# EAGLE board MotorDriverBreakouts_v19 (EAGLE 9.7.0)
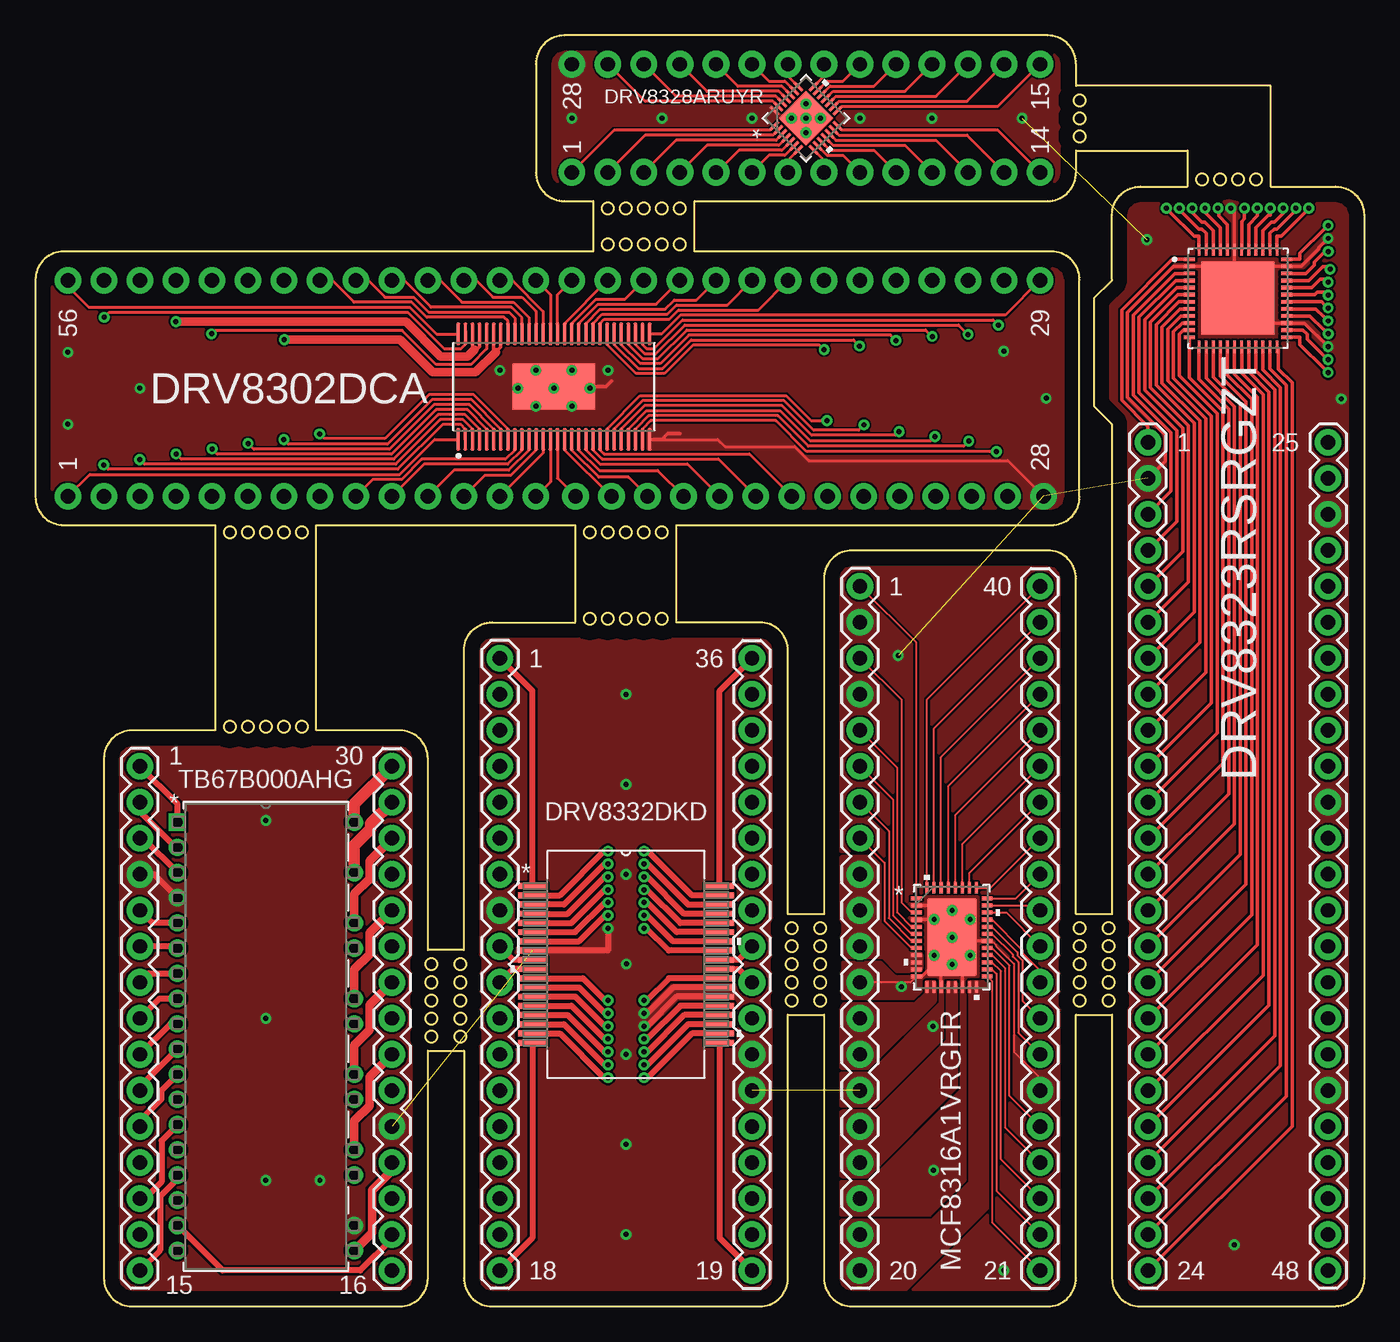
[diagram p0: board, top side]
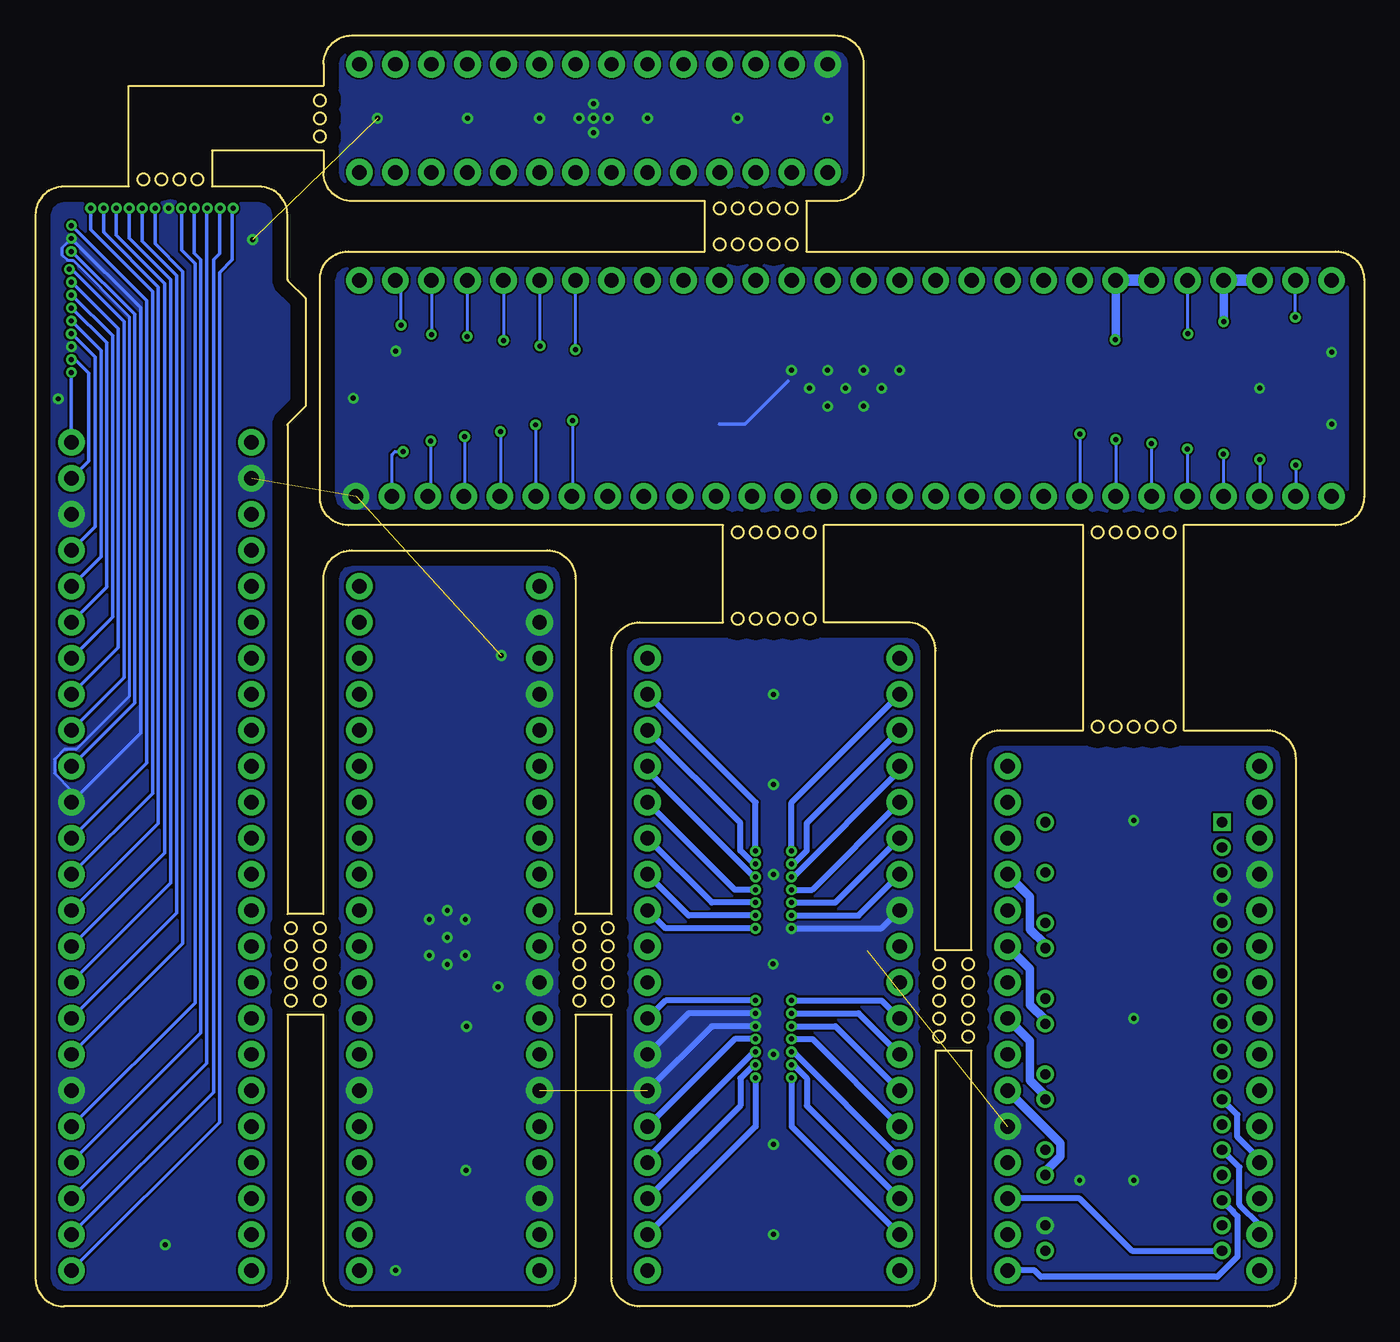
[diagram p1: board, bottom side, seen from below]

Size 93.73 x 89.66 mm. Coordinates in mm from the lower left corner, seen from the top.
Outline: 12.7,40.64 6.83,40.64 arc90 4.83,38.64 4.83,2 arc90 6.83,0 25.69,0 arc90 27.69,2 27.69,18.03 30.23,18.03 30.23,2 arc90 32.23,0 51.09,0 arc90 53.09,2 53.09,20.57 55.63,20.57 55.63,2 arc90 57.63,0 71.41,0 arc90 73.41,2 73.41,20.57 75.95,20.57 75.95,2 arc90 77.95,0 91.73,0 arc90 93.73,2 93.73,76.99 arc90 91.73,78.99 87.14,78.99 87.14,86.11 73.41,86.11 73.41,87.66 arc90 71.41,89.66 37.31,89.66 arc90 35.31,87.66 35.31,79.98 arc90 37.31,77.98 39.34,77.98 39.34,74.42 2,74.42 arc90 0,72.42 0,57.12 arc90 2,55.12 12.7,55.12 12.7,40.64
Outline: 75.95,72.45 75.95,76.99 arc-90 77.95,78.99 81.27,78.99 81.27,81.53 73.41,81.53 73.41,79.98 arc-90 71.41,77.98 46.5,77.98 46.5,74.42 71.66,74.42 arc-90 73.66,72.42 73.66,57.12 arc-90 71.66,55.12 45.21,55.12 45.21,48.26 51.09,48.26 arc-90 53.09,46.26 53.09,27.69 55.63,27.69 55.63,51.34 arc-90 57.63,53.34 71.41,53.34 arc-90 73.41,51.34 73.41,27.69 75.95,27.69 75.95,62.17 arc45 75.9,62.27 74.68,63.5 74.68,71.12 75.9,72.34 arc45 75.95,72.45
Outline: 30.23,25.15 30.23,46.26 arc-90 32.23,48.26 38.1,48.26 38.1,55.12 19.81,55.12 19.81,40.64 25.69,40.64 arc-90 27.69,38.64 27.69,25.15 30.23,25.15
Outline: circle at 40.39,77.47 radius 0.4
Outline: circle at 41.66,77.47 radius 0.4
Outline: circle at 42.93,77.47 radius 0.4
Outline: circle at 44.2,77.47 radius 0.4
Outline: circle at 45.47,77.47 radius 0.4
Outline: circle at 40.39,74.93 radius 0.4
Outline: circle at 41.66,74.93 radius 0.4
Outline: circle at 42.93,74.93 radius 0.4
Outline: circle at 44.2,74.93 radius 0.4
Outline: circle at 45.47,74.93 radius 0.4
Outline: circle at 75.69,26.67 radius 0.4
Outline: circle at 75.69,25.4 radius 0.4
Outline: circle at 75.69,24.13 radius 0.4
Outline: circle at 75.69,22.86 radius 0.4
Outline: circle at 75.69,21.59 radius 0.4
Outline: circle at 73.66,26.67 radius 0.4
Outline: circle at 73.66,25.4 radius 0.4
Outline: circle at 73.66,24.13 radius 0.4
Outline: circle at 73.66,22.86 radius 0.4
Outline: circle at 73.66,21.59 radius 0.4
Copper layers (1*16): Top / Bottom
Stack-up Default Layer Stack: Top User Defined 0.035mm / Dielectric-1 User Defined 1.5mm / Bottom User Defined 0.035mm
Design rules "default": minimum track width 6mil, minimum drill 0.35mm, track to track 6mil, track to pad 6mil, pad to pad 6mil, via to via 6mil, smd to smd 6mil, copper to edge 40mil, drill to drill 6mil, minimum pad ring 10mil, minimum via ring 8mil, stop-mask expansion 4mil, vias tented up to drill 0mil, thermal gap 10mil

## Footprints (pad centres in the part's own frame; a part is rotated, then mirrored left to right if it is on the bottom)
1X18 = drill 1.016 pad 1.88: 1 0,0; 2 2.54,0; 3 5.08,0; 4 7.62,0; 5 10.16,0; 6 12.7,0; 7 15.24,0; 8 17.78,0; 9 20.32,0; 10 22.86,0; 11 25.4,0; 12 27.94,0; 13 30.48,0; 14 33.02,0; 15 35.56,0; 16 38.1,0; 17 40.64,0; 18 43.18,0
1X15 = drill 1.016 pad 1.88: 1 0,0; 2 2.54,0; 3 5.08,0; 4 7.62,0; 5 10.16,0; 6 12.7,0; 7 15.24,0; 8 17.78,0; 9 20.32,0; 10 22.86,0; 11 25.4,0; 12 27.94,0; 13 30.48,0; 14 33.02,0; 15 35.56,0
1X20 = drill 1.016 pad 1.88: 1 0,0; 2 2.54,0; 3 5.08,0; 4 7.62,0; 5 10.16,0; 6 12.7,0; 7 15.24,0; 8 17.78,0; 9 20.32,0; 10 22.86,0; 11 25.4,0; 12 27.94,0; 13 30.48,0; 14 33.02,0; 15 35.56,0; 16 38.1,0; 17 40.64,0; 18 43.18,0; 19 45.72,0; 20 48.26,0
1X24 = drill 1.016 pad 1.88: 2 -26.67,0; 3 -24.13,0; 4 -21.59,0; 5 -19.05,0; 6 -16.51,0; 7 -13.97,0; 8 -11.43,0; 9 -8.89,0; 10 -6.35,0; 11 -3.81,0; 12 -1.27,0; 13 1.27,0; 14 3.81,0; 15 6.35,0; 16 8.89,0; 17 11.43,0; 18 13.97,0; 19 16.51,0; 20 19.05,0; 21 21.59,0; 22 24.13,0; 23 26.67,0; 24 29.21,0; 25 31.75,0
1X14_NO_SILK = drill 1.016 pad 1.88: 1 0,0; 2 2.54,0; 3 5.08,0; 4 7.62,0; 5 10.16,0; 6 12.7,0; 7 15.24,0; 8 17.78,0; 9 20.32,0; 10 22.86,0; 11 25.4,0; 12 27.94,0; 13 30.48,0; 14 33.02,0
DKD36 = smd 2.108 x 0.432: 1 -6.6,5.525; 2 -6.6,4.875; 3 -6.6,4.225; 4 -6.6,3.575; 5 -6.6,2.925; 6 -6.6,2.275; 7 -6.6,1.625; 8 -6.6,0.975; 9 -6.6,0.325; 10 -6.6,-0.325; 11 -6.6,-0.975; 12 -6.6,-1.625; 13 -6.6,-2.275; 14 -6.6,-2.925; 15 -6.6,-3.575; 16 -6.6,-4.225; 17 -6.6,-4.875; 18 -6.6,-5.525; 19 6.6,-5.525; 20 6.6,-4.875; 21 6.6,-4.225; 22 6.6,-3.575; 23 6.6,-2.925; 24 6.6,-2.275; 25 6.6,-1.625; 26 6.6,-0.975; 27 6.6,-0.325; 28 6.6,0.325; 29 6.6,0.975; 30 6.6,1.625; 31 6.6,2.275; 32 6.6,2.925; 33 6.6,3.575; 34 6.6,4.225; 35 6.6,4.875; 36 6.6,5.525
VQFN40_RGF_TEX = smd 0.8 x 0.25: 1 -2.5,2.751; 2 -2.5,2.251; 3 -2.5,1.75; 4 -2.5,1.25; 5 -2.5,0.75; 6 -2.5,0.25; 7 -2.5,-0.25; 8 -2.5,-0.75; 9 -2.5,-1.25; 10 -2.5,-1.75; 11 -2.5,-2.251; 12 -2.5,-2.751; 21 2.5,-2.751; 22 2.5,-2.251; 23 2.5,-1.75; 24 2.5,-1.25; 25 2.5,-0.75; 26 2.5,-0.25; 27 2.5,0.25; 28 2.5,0.75; 29 2.5,1.25; 30 2.5,1.75; 31 2.5,2.251; 32 2.5,2.751 | smd 0.25 x 0.8: 13 -1.75,-3.5; 14 -1.25,-3.5; 15 -0.75,-3.5; 16 -0.25,-3.5; 17 0.25,-3.5; 18 0.75,-3.5; 19 1.25,-3.5; 20 1.75,-3.5; 33 1.75,3.5; 34 1.25,3.5; 35 0.75,3.5; 36 0.25,3.5; 37 -0.25,3.5; 38 -0.75,3.5; 39 -1.25,3.5; 40 -1.75,3.5 | smd 3.5 x 5.5: 41 0,0
SOP50P810X120-57N = smd 1.57 x 0.28: 1 -3.72,6.75; 2 -3.72,6.25; 3 -3.72,5.75; 4 -3.72,5.25; 5 -3.72,4.75; 6 -3.72,4.25; 7 -3.72,3.75; 8 -3.72,3.25; 9 -3.72,2.75; 10 -3.72,2.25; 11 -3.72,1.75; 12 -3.72,1.25; 13 -3.72,0.75; 14 -3.72,0.25; 15 -3.72,-0.25; 16 -3.72,-0.75; 17 -3.72,-1.25; 18 -3.72,-1.75; 19 -3.72,-2.25; 20 -3.72,-2.75; 21 -3.72,-3.25; 22 -3.72,-3.75; 23 -3.72,-4.25; 24 -3.72,-4.75; 25 -3.72,-5.25; 26 -3.72,-5.75; 27 -3.72,-6.25; 28 -3.72,-6.75; 29 3.72,-6.75; 30 3.72,-6.25; 31 3.72,-5.75; 32 3.72,-5.25; 33 3.72,-4.75; 34 3.72,-4.25; 35 3.72,-3.75; 36 3.72,-3.25; 37 3.72,-2.75; 38 3.72,-2.25; 39 3.72,-1.75; 40 3.72,-1.25; 41 3.72,-0.75; 42 3.72,-0.25; 43 3.72,0.25; 44 3.72,0.75; 45 3.72,1.25; 46 3.72,1.75; 47 3.72,2.25; 48 3.72,2.75; 49 3.72,3.25; 50 3.72,3.75; 51 3.72,4.25; 52 3.72,4.75; 53 3.72,5.25; 54 3.72,5.75; 55 3.72,6.25; 56 3.72,6.75 | smd 3.235 x 5.82: 57 0,0
RUY0028A_WQFN_TEX = smd 0.805 x 0.203: 1 -1.947,1.2; 2 -1.947,0.8; 3 -1.947,0.4; 4 -1.947,0; 5 -1.947,-0.4; 6 -1.947,-0.8; 7 -1.947,-1.2; 15 1.947,-1.2; 16 1.947,-0.8; 17 1.947,-0.4; 18 1.947,0; 19 1.947,0.4; 20 1.947,0.8; 21 1.947,1.2 | smd 0.203 x 0.805: 8 -1.2,-1.947; 9 -0.8,-1.947; 10 -0.4,-1.947; 11 0,-1.947; 12 0.4,-1.947; 13 0.8,-1.947; 14 1.2,-1.947; 22 1.2,1.947; 23 0.8,1.947; 24 0.4,1.947; 25 0,1.947; 26 -0.4,1.947; 27 -0.8,1.947; 28 -1.2,1.947 | smd 2.692 x 2.692: 29 0,0
P-HDIP30-1233-1P78-001_TOS = drill 0.714 pad 1.222 square: 1 0,0 | drill 0.714 pad 1.222: 2 0,-1.778; 3 0,-3.556; 4 0,-5.334; 5 0,-7.112; 6 0,-8.89; 7 0,-10.668; 8 0,-12.446; 9 0,-14.224; 10 0,-16.002; 11 0,-17.78; 12 0,-19.558; 13 0,-21.336; 14 0,-23.114; 15 0,-24.892; 16 0,-26.67; 17 0,-28.448; 18 0,-30.226; 19 12.47,-30.226; 20 12.47,-28.448; 21 12.47,-24.892; 22 12.47,-23.114; 23 12.47,-19.558; 24 12.47,-17.78; 25 12.47,-14.224; 26 12.47,-12.446; 27 12.47,-8.89; 28 12.47,-7.112; 29 12.47,-3.556; 30 12.47,0
QFN50P700X700X100-49N = smd 0.86 x 0.26: 1 -3.435,2.75; 2 -3.435,2.25; 3 -3.435,1.75; 4 -3.435,1.25; 5 -3.435,0.75; 6 -3.435,0.25; 7 -3.435,-0.25; 8 -3.435,-0.75; 9 -3.435,-1.25; 10 -3.435,-1.75; 11 -3.435,-2.25; 12 -3.435,-2.75; 25 3.435,-2.75; 26 3.435,-2.25; 27 3.435,-1.75; 28 3.435,-1.25; 29 3.435,-0.75; 30 3.435,-0.25; 31 3.435,0.25; 32 3.435,0.75; 33 3.435,1.25; 34 3.435,1.75; 35 3.435,2.25; 36 3.435,2.75 | smd 0.26 x 0.86: 13 -2.75,-3.435; 14 -2.25,-3.435; 15 -1.75,-3.435; 16 -1.25,-3.435; 17 -0.75,-3.435; 18 -0.25,-3.435; 19 0.25,-3.435; 20 0.75,-3.435; 21 1.25,-3.435; 22 1.75,-3.435; 23 2.25,-3.435; 24 2.75,-3.435; 37 2.75,3.435; 38 2.25,3.435; 39 1.75,3.435; 40 1.25,3.435; 41 0.75,3.435; 42 0.25,3.435; 43 -0.25,3.435; 44 -0.75,3.435; 45 -1.25,3.435; 46 -1.75,3.435; 47 -2.25,3.435; 48 -2.75,3.435 | smd 5.15 x 5.15: 49 0,0

## Placement (x,y rotation side)
J1  [1X18]  32.77,45.72 270 top
J2  [1X18]  50.55,2.54 90 top
J3  [1X15]  7.37,38.1 270 top
J4  [1X15]  25.15,2.54 90 top
J5  [1X20]  58.17,50.8 270 top
J6  [1X20]  70.87,2.54 90 top
J7  [1X24]  78.49,34.29 270 top
J8  [1X14_NO_SILK]  2.29,57.15 0 top
J9  [1X14_NO_SILK]  38.1,57.15 0 top
J10  [1X14_NO_SILK]  70.87,72.39 180 top
J11  [1X14_NO_SILK]  35.31,72.39 180 top
J12  [1X14_NO_SILK]  37.85,80.01 0 top
J13  [1X14_NO_SILK]  70.87,87.63 180 top
J14  [1X24]  91.19,34.29 270 top
U1  DRV8332DKDDKD36  [DKD36]  41.66,24.13 0 top
U2  MCF8316A1VRGFRVQFN40_RGF_TEX  [VQFN40_RGF_TEX]  64.64,26.04 0 top
U3  DRV8302DCA  [SOP50P810X120-57N]  36.58,64.89 90 top
U4  DRV8328ARUYRRUY0028A_WQFN_TEX  [RUY0028A_WQFN_TEX]  54.36,83.82 45 top
U5  TB67B000AHGP-HDIP30-1233-1P78-001_TOS  [P-HDIP30-1233-1P78-001_TOS]  10.02,34.16 0 top
U6  DRV8323RSRGZT  [QFN50P700X700X100-49N]  84.84,71.12 0 top

## Library data of the parts
J1-J14 = SparkFun-Connectors
U1 = SnapEDA Library; COPYRIGHT: Copyright (C) 2023 Ultra Librarian. All rights reserved.; MANUFACTURER_PART_NUMBER: DRV8332DKD; MFR_NAME: Texas Instruments
U2 = SnapEDA Library; COPYRIGHT: Copyright (C) 2023 Ultra Librarian. All rights reserved.; MANUFACTURER_PART_NUMBER: MCF8316A1VRGFR; MFR_NAME: Texas Instruments
U3 = SnapEDA Library; MF: Texas Instruments; MP: DRV8302DCA; PACKAGE: HTSSOP-56 Texas Instruments; PRICE: None; STANDARD: IPC7351B
U4 = SnapEDA Library; COPYRIGHT: Copyright (C) 2023 Ultra Librarian. All rights reserved.; MANUFACTURER_PART_NUMBER: DRV8328ARUYR; MFR_NAME: Texas Instruments
U5 = SnapEDA Library; COPYRIGHT: Copyright (C) 2023 Ultra Librarian. All rights reserved.; MANUFACTURER_PART_NUMBER: TB67B000AHG; MFR_NAME: Toshiba Electronic Devices & Storage Corp.
U6 = SnapEDA Library; MANUFACTURER: Texas Instruments; MAXIMUM_PACKAGE_HEIGHT: 1 mm; PARTREV: C; STANDARD: IPC-7351B

## Nets
GND: J1.8 J2.6 J2.7 J3.4 J4.5 J5.2 J5.4 J5.12 J5.15 J5.18 J6.6 J7.3 J9.14 J13.14 J14.4 J14.12 J14.20 U1.8 U1.24 U1.25 U2.2 U2.4 U2.12 U2.15 U2.18 U2.26 U2.41 U3.28 U3.57 U4.28 U4.29 U5.4 U5.20 U6.2 U6.27 U6.35 U6.43 U6.49
N$1: J3.1 U5.1
N$2: J3.2 U5.2
N$3: J3.3 U5.3
N$5: J3.5 U5.5
N$6: J3.6 U5.6
N$7: J3.7 U5.7
N$8: J3.8 U5.8
N$9: J3.9 U5.9
N$10: J3.10 U5.10
N$11: J3.11 U5.11
N$12: J3.12 U5.12
N$13: J3.13 U5.13
N$14: J3.14 U5.14
N$15: J3.15 U5.15
N$16: J4.1 U5.16
N$17: J4.2 U5.17
N$18: J4.3 U5.18
N$19: J4.4 U5.19
N$21: J4.6 U5.21
N$22: J4.7 U5.22
N$23: J4.8 U5.23
N$24: J4.9 U5.24
N$25: J4.10 U5.25
N$26: J4.11 U5.26
N$27: J4.12 U5.27
N$28: J4.13 U5.28
N$29: J4.14 U5.29
N$30: J4.15 U5.30
N$31: J1.1 U1.1
N$32: J1.2 U1.2
N$33: J1.3 U1.3
N$34: J1.4 U1.4
N$35: J1.5 U1.5
N$36: J1.6 U1.6
N$37: J1.7 U1.7
N$39: J1.9 U1.9
N$40: J1.10 U1.10
N$41: J1.11 U1.11
N$42: J1.12 U1.12
N$43: J1.13 U1.13
N$44: J1.14 U1.14
N$45: J1.15 U1.15
N$46: J1.16 U1.16
N$47: J1.17 U1.17
N$48: J1.18 U1.18
N$49: J2.1 U1.19
N$50: J2.2 U1.20
N$51: J2.3 U1.21
N$52: J2.4 U1.22
N$53: J2.5 U1.23
N$56: J2.8 U1.26
N$57: J2.9 U1.27
N$58: J2.10 U1.28
N$59: J2.11 U1.29
N$60: J2.12 U1.30
N$61: J2.13 U1.31
N$62: J2.14 U1.32
N$63: J2.15 U1.33
N$64: J2.16 U1.34
N$65: J2.17 U1.35
N$66: J2.18 U1.36
N$67: J5.1 U2.1
N$69: J5.3 U2.3
N$71: J5.5 U2.5
N$72: J5.6 U2.6
N$73: J5.7 U2.7
N$74: J5.8 U2.8
N$77: J5.9 J5.10 J5.11 U2.9 U2.10 U2.11
N$79: J5.13 J5.14 U2.13 U2.14
N$82: J5.16 J5.17 U2.16 U2.17
N$85: J5.19 J5.20 U2.19 U2.20
N$87: J6.1 U2.21
N$88: J6.2 U2.22
N$89: J6.3 U2.23
N$90: J6.4 U2.24
N$91: J6.5 U2.25
N$93: J6.7 U2.27
N$94: J6.8 U2.28
N$95: J6.9 U2.29
N$96: J6.10 U2.30
N$97: J6.11 U2.31
N$98: J6.12 U2.32
N$99: J6.13 U2.33
N$100: J6.14 U2.34
N$101: J6.15 U2.35
N$102: J6.16 U2.36
N$103: J6.17 U2.37
N$104: J6.18 U2.38
N$105: J6.19 U2.39
N$106: J6.20 U2.40
N$107: J8.1 U3.1
N$108: J8.3 U3.3
N$109: J8.2 U3.2
N$110: J8.5 U3.5
N$111: J8.6 U3.6
N$112: J8.4 U3.4
N$113: J8.7 U3.7
N$114: J8.8 U3.8
N$115: J8.9 U3.9
N$116: J8.11 U3.11
N$117: J8.10 U3.10
N$118: J8.12 U3.12
N$119: J9.2 U3.16
N$120: J9.1 U3.15
N$121: J8.14 U3.14
N$122: J8.13 U3.13
N$123: J9.3 U3.17
N$124: J9.4 U3.18
N$125: J9.5 U3.19
N$126: J9.6 U3.20
N$127: J9.8 U3.22
N$128: J9.7 U3.21
N$129: J9.10 U3.24
N$130: J9.9 U3.23
N$131: J9.11 U3.25
N$132: J9.12 U3.26
N$133: J9.13 U3.27
N$134: J10.1 U3.29
N$135: J10.2 U3.30
N$137: J10.3 U3.31
N$138: J10.4 U3.32
N$139: J10.5 U3.33
N$140: J10.6 U3.34
N$141: J10.7 U3.35
N$142: J10.9 U3.37
N$143: J10.8 U3.36
N$144: J10.10 U3.38
N$145: J10.11 U3.39
N$146: J10.12 U3.40
N$147: J10.14 U3.42
N$148: J11.1 U3.43
N$149: J10.13 U3.41
N$150: J11.3 U3.45
N$151: J11.2 U3.44
N$152: J11.4 U3.46
N$153: J11.5 U3.47
N$154: J11.6 U3.48
N$155: J11.7 U3.49
N$156: J11.8 J11.9 U3.50 U3.51
N$157: J11.10 U3.52
N$158: J11.11 J11.12 U3.53 U3.54
N$159: J11.13 U3.55
N$160: J11.14 U3.56
N$161: J12.1 U4.1
N$162: J12.2 U4.2
N$163: J12.3 U4.3
N$164: J12.4 U4.4
N$165: J12.5 U4.5
N$166: J12.6 U4.6
N$167: J12.7 U4.7
N$168: J12.8 U4.8
N$169: J12.9 U4.9
N$170: J12.10 U4.10
N$171: J12.11 U4.11
N$172: J12.12 U4.12
N$173: J12.13 U4.13
N$174: J12.14 U4.14
N$175: J13.1 U4.15
N$176: J13.2 U4.16
N$177: J13.3 U4.17
N$178: J13.4 U4.18
N$179: J13.5 U4.19
N$180: J13.6 U4.20
N$181: J13.7 U4.21
N$182: J13.8 U4.22
N$183: J13.9 U4.23
N$184: J13.10 U4.24
N$185: J13.11 U4.25
N$186: J13.12 U4.26
N$187: J13.13 U4.27
N$189: J7.2 U6.1
N$190: J7.4 U6.3
N$192: J7.5 U6.4
N$193: J7.6 U6.5
N$194: J7.7 U6.6
N$195: J7.8 U6.7
N$196: J7.10 U6.9
N$197: J7.9 U6.8
N$198: J7.12 U6.11
N$199: J7.13 U6.12
N$200: J7.14 U6.13
N$201: J7.15 U6.14
N$202: J7.17 U6.16
N$203: J7.18 U6.17
N$204: J7.16 U6.15
N$205: J7.11 U6.10
N$206: J7.22 U6.21
N$207: J7.23 U6.22
N$208: J7.20 U6.19
N$209: J7.19 U6.18
N$210: J7.21 U6.20
N$211: J7.24 U6.23
N$212: J7.25 U6.24
N$213: J14.2 U6.25
N$214: J14.3 U6.26
N$215: J14.5 U6.28
N$217: J14.6 U6.29
N$218: J14.7 U6.30
N$219: J14.8 U6.31
N$220: J14.9 U6.32
N$221: J14.10 U6.33
N$222: J14.11 U6.34
N$224: J14.14 U6.37
N$225: J14.15 U6.38
N$226: J14.16 U6.39
N$227: J14.17 U6.40
N$228: J14.25 U6.48
N$229: J14.24 U6.47
N$230: J14.23 U6.46
N$231: J14.22 U6.45
N$232: J14.21 U6.44
N$234: J14.19 U6.42
N$235: J14.18 U6.41
N$236: J14.13 U6.36

## Tracks (layer width: path | path; a pad name or v marks a point on that pad's centre or on a via)
GND  (via drill 0.35)  (5 unrouted)
  Top 0.152: J5.12 61.72,22.86 U2.12 | U2.26 67.48,25.79 67.77,25.49 67.77,25.42 69.03,24.17 69.03,17.97 70.87,16.13 J6.6
  Top 0.2: 44.2,61.17 48.13,61.17 48.63,60.67 53.55,60.67 54.54,59.68 68.59,59.68 J9.14
  Top 0.254: U2.18 65.39,26.04 U2.41 | U2.41 64.64,27.29 | 64.64,27.29 U2.4 | U2.2 64.64,28.29 64.64,27.29 | U2.41 64.64,25.38 62.55,23.28 U2.12 | U2.41 64.89,25.79 U2.26 | U2.41 63.89,25.29 U2.15 | J7.3 79.7,59.64 79.7,61.47 77.03,64.14 77.03,70.11 80.29,73.37 U6.2 82.59,73.37 U6.49 | v84.33,77.47 84.59,77.21 U6.43 84.59,71.37 U6.49 | U6.49 87.09,73.37 U6.35 89.28,73.37 90.53,74.61 90.53,74.71 90.91,75.09 90.93,75.09 v91.19,75.34 | U6.49 86.59,69.37 U6.27 89.52,69.37 v91.19,67.71 | U3.57 40.25,64.89 40.64,65.28 | U3.28 44.2,61.17 44.6,61.57 45.47,61.57
  Top 0.406: U1.8 40.39,25.11 v40.39,26.67 | U1.24 45.23,21.86 43.15,19.77 v42.93,19.77 | U1.25 44.96,22.5 43.14,20.68 v42.93,20.68 | U5.4 8.37,30.48 J3.4
  Bottom 0.2: J14.12 91.19,36.41 92.38,37.61 92.38,38.59 91.68,39.29 90.85,39.29 87.09,43.05 87.09,69.82 91.07,73.79 91.46,73.79 91.83,74.16 91.83,74.68 91.19,75.33 v91.19,75.34
  Bottom 0.254: v91.19,75.34 86.29,70.44 86.29,40.46 J14.12 | 40.64,65.28 43.69,62.23 45.47,62.23
  Bottom 0.406: J1.8 34.04,26.67 v40.39,26.67 | J2.6 46.01,19.77 v42.93,19.77 | J2.7 47.65,20.68 v42.93,20.68
  other vias: 71.31,64.07 68.3,67.39 78.4,75.26 92.12,64.03 84.58,4.36 63.36,9.6 63.31,19.76 60.87,45.93 41.69,24.15 16.26,34.29 16.26,20.32 16.26,8.89 2.29,67.31 2.29,62.23 7.37,64.77 36.58,64.77 39.12,64.77 37.85,66.04 37.85,63.5 35.31,66.04 35.31,63.5 34.04,64.77 64.67,26.04 64.67,27.94 64.67,24.13 65.94,27.3 63.4,27.3 63.4,24.77 65.94,24.77 68.33,2.54 61.09,22.56 40.39,66.04 32.77,66.04 41.66,17.78 41.66,11.43 41.66,5.08 41.66,30.48 41.66,36.83 41.66,43.18 20.07,8.89 54.36,84.84 54.36,83.82 55.37,83.82 53.34,83.82 54.36,82.8 37.85,83.82 44.2,83.82 69.6,83.82 63.25,83.82 58.17,83.82 50.55,83.82
  pour Top (rank 6, no thermals): -15.49,104.14 110.24,104.14 110.24,-33.02 -15.49,-33.02
  pour Bottom (no thermals): -33.27,121.92 136.91,121.92 136.91,-13.97 -33.27,-13.97
N$1
  Top 0.406: U5.1 10.02,35.45 J3.1
N$2
  Top 0.406: U5.2 9.89,32.38 7.37,34.91 J3.2
N$3
  Top 0.406: U5.3 7.61,33.02 J3.3
N$5
  Top 0.406: U5.5 8.25,27.05 J3.5
N$6
  Top 0.406: U5.6 9.89,25.4 J3.6
N$7
  Top 0.406: J3.7 8,23.5 U5.7
N$8
  Top 0.406: J3.8 8.76,21.72 U5.8
N$9
  Top 0.406: J3.9 9.52,19.94 U5.9
N$10
  Top 0.406: J3.10 7.37,15.51 U5.10
N$11
  Top 0.406: U5.11 8.89,15.25 8.89,14.62 7.37,13.1 J3.11
N$12
  Bottom 0.406: U5.12 8.94,13.53 8.94,11.96 7.37,10.38 J3.12
N$13
  Top 0.406: U5.13 8.89,11.7 8.89,8.78 7.73,7.62 J3.13
N$14
  Bottom 0.406: J3.14 7.37,5.76 8.79,7.18 8.79,9.82 U5.14
N$15
  Top 0.406: U5.15 10.02,8.99 8.79,7.76 8.79,3.96 J3.15
N$16
  Bottom 0.406: J4.1 23.25,2.54 22.8,2.08 10.36,2.08 8.93,3.52 8.93,6.37 9.25,6.69 9.25,6.72 U5.16
N$17
  Top 0.406: U5.17 13.2,2.54 22.91,2.54 25.15,4.78 J4.2
N$18
  Bottom 0.406: U5.18 16.38,3.94 20.07,7.62 J4.3
N$19
  Top 0.61: U5.19 23.75,5.2 23.75,8.2 25.15,9.6 J4.4
N$21
  Bottom 0.61: J4.6 21.42,11.52 21.42,10.61 22.49,9.54 U5.21
N$22
  Top 0.61: J4.7 23.56,16.19 23.56,14.16 22.49,13.09 U5.22
N$23
  Bottom 0.61: U5.23 22.49,14.87 23.56,15.94 23.56,18.73 J4.8
N$24
  Top 0.61: U5.24 22.49,18.43 23.56,19.5 23.56,21.27 J4.9
N$25
  Bottom 0.61: U5.25 22.49,20.21 23.56,21.27 23.56,23.81 J4.10
N$26
  Top 0.61: U5.26 22.49,23.76 23.56,24.83 23.56,26.35 J4.11
N$27
  Bottom 0.61: U5.27 22.49,25.54 23.56,26.61 23.56,28.89 J4.12
N$28
  Top 0.61: U5.28 22.49,29.1 23.56,30.16 23.56,31.43 J4.13
N$29
  Top 0.813: J4.14 23.66,34.08 23.66,33.68 22.49,32.51 U5.29
N$30
  Top 0.813: U5.30 22.49,35.45 J4.15
N$31
  Top 0.406: U1.1 35.06,43.43 J1.1
N$32  (via drill 0.35)
  Top 0.406: U1.2 37.01,29 40.12,32.12 v40.39,32.12
  Bottom 0.406: J1.2 40.39,35.56 v40.39,32.12
N$33  (via drill 0.35)
  Top 0.406: U1.3 37.27,28.36 40.13,31.21 v40.39,31.21
  Bottom 0.406: J1.3 39.31,34.1 39.31,32.16 40.26,31.21 v40.39,31.21
N$34  (via drill 0.35)
  Top 0.406: U1.4 37.54,27.7 40.15,30.3 v40.39,30.3
  Bottom 0.406: v40.39,30.3 40.26,30.3 32.77,37.8 J1.4
N$35  (via drill 0.35)
  Top 0.406: U1.5 37.81,27.05 40.16,29.4 v40.39,29.4
  Bottom 0.406: J1.5 38.93,29.4 v40.39,29.4
N$36  (via drill 0.35)
  Top 0.406: U1.6 38.08,26.41 40.17,28.49 v40.39,28.49
  Bottom 0.406: J1.6 37.3,28.49 v40.39,28.49
N$37  (via drill 0.35)
  Top 0.406: U1.7 38.35,25.75 40.18,27.58 v40.39,27.58
  Bottom 0.406: J1.7 35.67,27.58 v40.39,27.58
N$39
  Top 0.406: U1.9 33.71,24.45 J1.9
N$40
  Top 0.406: U1.10 33.71,23.8 J1.10
N$41  (via drill 0.35)
  Top 0.406: U1.11 38.62,23.16 40.19,21.59 v40.39,21.59
  Bottom 0.406: J1.11 34.04,21.59 v40.39,21.59
N$42  (via drill 0.35)
  Top 0.406: U1.12 38.35,22.5 40.18,20.68 v40.39,20.68
  Bottom 0.406: J1.12 35.67,20.68 v40.39,20.68
N$43  (via drill 0.35)
  Top 0.406: U1.13 38.08,21.86 40.17,19.77 v40.39,19.77
  Bottom 0.406: J1.13 37.3,19.77 v40.39,19.77
N$44  (via drill 0.35)
  Top 0.406: U1.14 37.81,21.2 40.16,18.86 v40.39,18.86
  Bottom 0.406: J1.14 38.93,18.86 v40.39,18.86
N$45  (via drill 0.35)
  Top 0.406: U1.15 37.54,20.55 40.15,17.95 v40.39,17.95
  Bottom 0.406: v40.39,17.95 40.26,17.95 32.77,10.46 J1.15
N$46  (via drill 0.35)
  Top 0.406: U1.16 37.27,19.91 40.13,17.05 v40.39,17.05
  Bottom 0.406: J1.16 39.31,14.16 39.31,16.09 40.26,17.05 v40.39,17.05
N$47  (via drill 0.35)
  Top 0.406: U1.17 37.01,19.25 40.12,16.14 v40.39,16.14
  Bottom 0.406: J1.17 40.39,12.7 v40.39,16.14
N$48
  Top 0.406: U1.18 35.06,4.83 J1.18
N$49
  Top 0.406: U1.19 48.26,4.83 J2.1
N$50  (via drill 0.35)
  Top 0.406: U1.20 46.31,19.25 43.19,16.14 v42.93,16.14
  Bottom 0.406: J2.2 42.93,12.7 v42.93,16.14
N$51  (via drill 0.35)
  Top 0.406: U1.21 46.04,19.91 43.18,17.05 v42.93,17.05
  Bottom 0.406: J2.3 44.01,14.16 44.01,16.09 43.05,17.05 v42.93,17.05
N$52  (via drill 0.35)
  Top 0.406: U1.22 45.77,20.55 43.17,17.95 v42.93,17.95
  Bottom 0.406: v42.93,17.95 43.05,17.95 50.55,10.46 J2.4
N$53  (via drill 0.35)
  Top 0.406: U1.23 45.5,21.2 43.16,18.86 v42.93,18.86
  Bottom 0.406: J2.5 44.38,18.86 v42.93,18.86
N$56  (via drill 0.35)
  Top 0.406: U1.26 44.69,23.16 43.13,21.59 v42.93,21.59
  Bottom 0.406: J2.8 49.28,21.59 v42.93,21.59
N$57
  Top 0.406: U1.27 49.6,23.8 J2.9
N$58
  Top 0.406: U1.28 49.6,24.45 J2.10
N$59  (via drill 0.35)
  Top 0.406: U1.29 44.69,25.11 43.13,26.67 v42.93,26.67
  Bottom 0.406: J2.11 49.28,26.67 v42.93,26.67
N$60  (via drill 0.35)
  Top 0.406: U1.30 44.96,25.75 43.14,27.58 v42.93,27.58
  Bottom 0.406: J2.12 47.65,27.58 v42.93,27.58
N$61  (via drill 0.35)
  Top 0.406: U1.31 45.23,26.41 43.15,28.49 v42.93,28.49
  Bottom 0.406: J2.13 46.01,28.49 v42.93,28.49
N$62  (via drill 0.35)
  Top 0.406: U1.32 45.5,27.05 43.16,29.4 v42.93,29.4
  Bottom 0.406: J2.14 44.38,29.4 v42.93,29.4
N$63  (via drill 0.35)
  Top 0.406: U1.33 45.77,27.7 43.17,30.3 v42.93,30.3
  Bottom 0.406: v42.93,30.3 43.05,30.3 50.55,37.8 J2.15
N$64  (via drill 0.35)
  Top 0.406: U1.34 46.04,28.36 43.18,31.21 v42.93,31.21
  Bottom 0.406: J2.16 44.01,34.1 44.01,32.16 43.05,31.21 v42.93,31.21
N$65  (via drill 0.35)
  Top 0.406: U1.35 46.31,29 43.19,32.12 v42.93,32.12
  Bottom 0.406: J2.17 42.93,35.56 v42.93,32.12
N$66
  Top 0.406: U1.36 48.26,43.43 J2.18
N$67
  Top 0.152: J5.1 62.14,46.82 U2.1
N$69
  Top 0.152: U2.3 61.81,27.79 61.11,28.48 61.11,42.77 J5.3
N$71
  Top 0.152: U2.5 61.81,26.79 60.81,27.78 60.81,38 J5.5
N$72
  Top 0.152: U2.6 61.81,26.29 60.5,27.59 60.5,35.76 J5.6
N$73
  Top 0.152: U2.7 61.81,25.79 60.2,27.39 60.2,33.53 J5.7
N$74
  Top 0.152: U2.8 61.81,25.29 59.89,27.2 59.89,31.29 J5.8
N$77
  pour Top (no thermals): 62.64,25.02 61.77,25.02 59.72,27.08 59.72,31.14 59,31.85 56.16,31.85 56.16,25.4 57.05,24.51 59.74,24.51 60.73,23.52 62.64,23.52
N$79
  pour Top (no thermals): 56.39,21.46 62.05,21.46 62.71,22.12 62.71,22.94 62.79,23.01 63.55,23.01 63.58,22.99 63.58,21.49 58.78,16.69 56.36,16.69 56.36,21.44
N$82
  pour Top (no thermals): 64.24,22.96 64.24,18.8 59.33,13.89 56.31,13.89 56.31,9.3 56.57,9.04 58.72,9.04 65.07,15.39 65.07,22.96
N$85
  pour Top (no thermals): 65.81,23.01 65.81,8.79 63.22,6.2 56.44,6.2 56.41,6.17 56.41,1.22 56.87,0.76 61.14,0.76 67.26,6.88 67.26,22.66 66.9,23.01
N$87
  Top 0.152: J6.1 67.5,5.91 67.5,22.93 U2.21
N$88
  Top 0.152: U2.22 67.48,23.78 67.8,23.46 67.8,8.14 J6.2
N$89
  Top 0.152: U2.23 67.48,24.29 68.11,23.66 68.11,10.38 J6.3
N$90
  Top 0.152: U2.24 67.48,24.79 68.41,23.85 68.41,12.61 J6.4
N$91
  Top 0.152: J6.5 68.72,14.84 68.72,24.04 67.48,25.29 U2.25
N$93
  Top 0.152: U2.27 67.48,26.29 68.94,24.83 68.94,24.69 69.33,24.3 69.33,19.31 J6.7
N$94
  Top 0.152: U2.28 67.48,26.79 69.29,24.98 69.29,24.77 69.64,24.42 69.64,21.55 J6.8
N$95
  Top 0.152: J6.9 70.87,23.71 69.64,24.95 69.64,25.13 67.48,27.29 U2.29
N$96
  Top 0.152: J6.10 68.48,27.79 U2.30
N$97
  Top 0.152: J6.11 70.52,28.29 U2.31
N$98
  Top 0.152: J6.12 69.17,28.79 U2.32
N$99
  Top 0.152: J6.13 67.38,29.54 U2.33
N$100
  Top 0.152: J6.14 65.89,30.59 U2.34
N$101
  Top 0.152: J6.15 65.39,32.63 U2.35
N$102
  Top 0.152: J6.16 64.89,34.67 U2.36
N$103
  Top 0.152: J6.17 64.39,36.71 U2.37
N$104
  Top 0.152: J6.18 63.89,38.75 U2.38
N$105
  Top 0.152: J6.19 63.39,40.79 U2.39
N$106
  Top 0.152: J6.20 62.89,42.83 U2.40
N$107
  Top 0.2: U3.1 28.17,61.17 25.69,58.7 3.83,58.7 J8.1
N$108  (via drill 0.35)
  Top 0.2: U3.3 30.83,61.91 30.18,62.56 28.56,62.56 25.42,59.41 7.69,59.41 v7.36,59.75
  Bottom 0.2: J8.3 7.37,59.74 v7.36,59.75
N$109  (via drill 0.35)
  Top 0.2: U3.2 30.33,61.91 30.03,62.2 28.71,62.2 25.56,59.06 5.12,59.06 v4.82,59.37
  Bottom 0.2: J8.2 v4.83,59.36 v4.82,59.37
N$110  (via drill 0.35)
  Top 0.2: v12.46,60.49 12.83,60.12 25.12,60.12 28.27,63.26 30.47,63.26 31.83,61.91 U3.5
  Bottom 0.2: v12.46,60.49 12.46,57.16 J8.5
N$111  (via drill 0.35)
  Top 0.2: U3.6 32.33,61.91 30.62,63.62 28.12,63.62 24.98,60.47 15.41,60.47 v15,60.88
  Bottom 0.2: v15,60.88 15,57.16 J8.6
N$112  (via drill 0.35)
  Top 0.2: U3.4 31.33,61.91 30.32,62.91 28.41,62.91 25.27,59.77 10.3,59.77 v9.92,60.14
  Bottom 0.2: v9.92,60.14 9.92,57.16 J8.4
N$113  (via drill 0.35)
  Top 0.2: U3.7 32.83,61.91 30.77,63.97 27.98,63.97 24.83,60.82 17.85,60.82 v17.52,61.16
  Bottom 0.2: v17.52,61.16 J8.7
N$114  (via drill 0.35)
  Top 0.2: U3.8 33.33,61.91 30.91,64.32 27.76,64.32 24.66,61.22 20.38,61.22 v20.05,61.55
  Bottom 0.2: v20.05,61.55 20.05,57.17 J8.8
N$115
  Top 0.2: U3.9 33.83,60.43 33.16,59.76 27.26,59.76 25.84,58.34 23.8,58.34 J8.9
N$116
  Top 0.2: J8.11 29.53,58.99 33.39,58.99 34.83,60.43 U3.11
N$117
  Top 0.2: U3.10 34.33,60.43 33.31,59.41 27.4,59.41 J8.10
N$118
  Top 0.2: J8.12 31.7,58.62 33.52,58.62 35.33,60.43 U3.12
N$119
  Top 0.2: J9.2 40.6,57.15 37.33,60.43 U3.16
N$120
  Top 0.2: J9.1 36.83,58.42 U3.15
N$121
  Top 0.2: J8.14 36.33,58.17 U3.14
N$122
  Top 0.2: J8.13 35.83,60.21 U3.13
N$123
  Top 0.2: J9.3 41.83,58.5 39.75,58.5 37.83,60.43 U3.17
N$124
  Top 0.2: J9.4 43.9,58.97 39.78,58.97 38.33,60.43 U3.18
N$125
  Top 0.2: J9.5 45.98,59.43 39.83,59.43 38.83,60.43 U3.19
N$126
  Top 0.2: J9.6 48.17,59.78 39.98,59.78 39.33,60.43 U3.20
N$127  (via drill 0.35)
  Top 0.2: v55.83,62.49 54.72,62.49 52.96,64.25 42.66,64.25 40.33,61.91 U3.22
  Bottom 0.2: v55.83,62.49 55.83,57.2 J9.8
N$128
  Top 0.2: J9.7 50.36,60.13 40.12,60.13 39.83,60.43 U3.21
N$129  (via drill 0.35)
  Top 0.2: U3.24 41.33,61.91 42.96,63.54 52.67,63.54 54.75,61.46 60.67,61.46 v60.92,61.71
  Bottom 0.2: J9.10 60.91,57.2 60.91,61.7 v60.92,61.71
N$130  (via drill 0.35)
  Top 0.2: v58.44,62.19 58.06,61.81 54.9,61.81 52.81,63.89 42.81,63.89 40.83,61.91 U3.23
  Bottom 0.2: J9.9 58.42,62.17 v58.44,62.19
N$131  (via drill 0.35)
  Top 0.2: U3.25 41.83,61.91 43.11,63.19 52.52,63.19 54.63,61.08 63.18,61.08 v63.46,61.36
  Bottom 0.2: v63.46,61.36 63.46,57.19 J9.11
N$132  (via drill 0.35)
  Top 0.2: U3.26 42.33,61.91 43.25,62.84 52.38,62.84 54.53,60.68 65.48,60.68 v65.84,61.04
  Bottom 0.2: v65.84,61.04 65.84,57.35 J9.12
N$133  (via drill 0.35)
  Top 0.2: U3.27 42.83,61.91 43.4,62.48 52.23,62.48 54.41,60.31 v67.79,60.31
  Bottom 0.2: J9.13 68.58,60.1 68.37,60.31 v67.79,60.31
N$134
  Top 0.2: J10.1 68.42,69.94 45.52,69.94 44.18,68.61 U3.29
N$135  (via drill 0.35)
  Top 0.2: U3.30 42.83,67.87 43.12,67.57 43.64,67.57 45.66,69.59 67.57,69.59 v67.93,69.23
  Bottom 0.2: J10.2 67.93,72 v67.93,69.23
N$137  (via drill 0.35)
  Top 0.2: U3.31 42.33,67.87 42.98,67.22 43.79,67.22 45.81,69.24 65.12,69.24 v65.79,68.57
  Bottom 0.2: J10.3 v65.79,68.57
N$138  (via drill 0.35)
  Top 0.2: U3.32 41.83,67.87 42.83,66.87 43.93,66.87 45.96,68.89 62.8,68.89 v63.26,68.42
  Bottom 0.2: J10.4 63.26,72.37 v63.26,68.42
N$139  (via drill 0.35)
  Top 0.2: U3.33 41.33,67.87 42.68,66.51 44.08,66.51 46.1,68.53 60.32,68.53 v60.7,68.15
  Bottom 0.2: v60.7,68.15 v60.71,68.15 J10.5
N$140  (via drill 0.35)
  Top 0.2: U3.34 40.83,67.87 42.53,66.16 44.23,66.16 46.25,68.18 57.71,68.18 v58.13,67.76
  Bottom 0.2: J10.6 58.17,67.79 v58.13,67.76
N$141  (via drill 0.35)
  Top 0.2: U3.35 40.33,67.87 42.38,65.81 44.37,65.81 46.39,67.83 55.3,67.83 v55.63,67.5
  Bottom 0.2: v55.63,67.5 55.63,69.36 55.63,69.37 J10.7
N$142
  Top 0.2: U3.37 39.33,69.35 39.98,70 44.57,70 45.23,70.65 48.8,70.65 J10.9
N$143
  Top 0.2: U3.36 39.83,69.35 40.12,69.64 44.72,69.64 45.37,70.3 50.99,70.3 J10.8
N$144
  Top 0.2: U3.38 38.83,69.35 39.83,70.35 44.43,70.35 45.08,71 46.62,71 J10.10
N$145
  Top 0.2: J10.11 43.78,70.7 39.68,70.7 38.33,69.35 U3.39
N$146
  Top 0.2: J10.12 41.59,71.06 39.53,71.06 37.83,69.35 U3.40
N$147
  Top 0.2: J10.14 36.83,71.37 U3.42
N$148
  Top 0.2: U3.43 36.33,71.37 J11.1
N$149
  Top 0.2: J10.13 40.37,72.39 37.33,69.35 U3.41
N$150
  Top 0.2: U3.45 35.31,68.63 35.31,70.21 34.31,71.2 32.27,71.2 31.08,72.39 J11.3
N$151
  Top 0.2: U3.44 35.83,70.18 33.62,72.39 J11.2
N$152
  Top 0.2: J11.4 28.54,72.39 30.09,70.84 33.73,70.84 34.83,69.75 U3.46
N$153
  Top 0.2: U3.47 34.33,69.75 33.58,70.49 27.9,70.49 26,72.39 J11.5
N$154
  Top 0.2: U3.48 33.83,69.73 33.41,70.14 27.75,70.14 26.69,71.2 24.65,71.2 23.46,72.39 J11.6
N$155
  Top 0.2: U3.49 33.33,69.53 33.07,69.79 27.61,69.79 26.55,70.84 22.46,70.84 20.92,72.39 J11.7
N$156  (via drill 0.35)
  Top 0.2: 32.33,67.49 32.48,67.33
  Top 0.254: U3.51 32.33,67.49 | 32.48,67.33 32.83,67.67 U3.50
  Top 0.61: v17.55,68.2 25.73,68.2 28.03,65.9 31.05,65.9 32.48,67.33
  Bottom 0.61: v17.55,68.2 17.53,68.22 J11.8
  Bottom 0.813: J11.8 J11.9
N$157  (via drill 0.35)
  Top 0.2: v12.42,68.61 12.65,68.84 25.88,68.84 28.27,66.46 30.72,66.46 31.83,67.56 U3.52
  Bottom 0.2: J11.10 12.45,68.61 v12.42,68.61
N$158  (via drill 0.35)
  Top 0.2: 30.83,67.63 30.96,67.49 31.03,67.43
  Top 0.254: 30.83,67.63 U3.54 | 31.03,67.43 31.33,67.73 U3.53
  Top 0.61: v9.91,69.47 26.13,69.47 28.59,67.01 30.49,67.01 30.96,67.49
  Bottom 0.61: v9.91,69.47 v9.91,69.48 J11.11
  Bottom 0.813: J11.12 J11.11
N$159  (via drill 0.35)
  Top 0.2: U3.55 30.33,68.73 30.37,68.78 30.37,67.91 30.03,67.57 28.83,67.57 26.27,70.13 5.2,70.13 v4.85,69.77
  Bottom 0.2: v4.85,69.77 4.85,72.37 J11.13
N$160
  Top 0.2: U3.56 28.29,68.61 26.4,70.49 3.77,70.49 2.29,71.97 J11.14
N$161
  Top 0.203: U4.1 51.82,82.98 40.82,82.98 J12.1
N$162
  Top 0.203: U4.2 52.03,82.63 43,82.63 J12.2
N$163
  Top 0.203: U4.3 52.24,82.27 45.19,82.27 J12.3
N$164
  Top 0.203: U4.4 52.45,81.92 47.37,81.92 J12.4
N$165
  Top 0.203: J12.5 48.1,80.01 49.65,81.56 52.66,81.56 U4.5
N$166
  Top 0.203: U4.6 52.87,81.2 51.74,81.2 J12.6
N$167
  Top 0.203: U4.7 53.09,80.85 J12.7
N$168
  Top 0.203: U4.8 55.63,80.85 J12.8
N$169
  Top 0.203: U4.9 55.84,81.2 56.97,81.2 J12.9
N$170
  Top 0.203: U4.10 56.05,81.56 59.16,81.56 J12.10 | U4.10
N$171
  Top 0.203: U4.11 56.26,81.92 61.34,81.92 J12.11 | U4.11
N$172
  Top 0.203: U4.12 56.47,82.27 63.52,82.27 J12.12
N$173
  Top 0.203: U4.13 56.68,82.63 65.71,82.63 J12.13 | U4.13
N$174
  Top 0.203: U4.14 56.89,82.98 67.89,82.98 J12.14
N$175
  Top 0.203: U4.15 56.89,84.66 67.89,84.66 J13.1
N$176
  Top 0.203: U4.16 56.68,85.01 65.71,85.01 J13.2 | U4.16
N$177
  Top 0.203: U4.17 56.47,85.37 63.52,85.37 J13.3 | U4.17
N$178
  Top 0.203: U4.18 56.26,85.72 61.34,85.72 J13.4
N$179
  Top 0.203: U4.19 56.05,86.08 59.16,86.08 J13.5 | U4.19
N$180
  Top 0.203: J13.6 56.97,86.44 55.84,86.44 U4.20 | U4.20
N$181
  Top 0.203: J13.7 55.63,86.79 U4.21
N$182
  Top 0.203: U4.22 53.09,86.79 J13.8 | U4.22
N$183
  Top 0.203: J13.9 51.74,86.44 52.87,86.44 U4.23 | U4.23
N$184
  Top 0.203: J13.10 49.56,86.08 52.66,86.08 U4.24
N$185
  Top 0.203: J13.11 47.37,85.72 52.45,85.72 U4.25
N$186
  Top 0.203: U4.26 52.24,85.37 45.19,85.37 J13.12
N$187
  Top 0.203: U4.27 52.03,85.01 43,85.01 J13.13
N$189
  Top 0.254: U6.1 80.22,73.87 76.63,70.28 76.63,63.94 78.49,62.08 J7.2
N$190
  Top 0.254: U6.3 80.37,72.87 77.44,69.94 77.44,64.31 80.11,61.63 80.11,57.51 J7.4
N$192
  Top 0.254: U6.4 80.44,72.37 77.85,69.78 77.85,64.47 80.52,61.8 80.52,55.37 J7.5
N$193
  Top 0.254: U6.5 80.52,71.87 78.25,69.61 78.25,64.64 80.92,61.97 80.92,53.24 J7.6
N$194
  Top 0.254: U6.6 80.59,71.37 78.66,69.44 78.66,64.81 81.33,62.14 81.33,51.1 J7.7
N$195
  Top 0.254: U6.7 80.67,70.87 79.07,69.27 79.07,64.98 81.74,62.31 81.74,48.97 J7.8
N$196
  Top 0.254: U6.9 80.81,69.87 79.88,68.93 79.88,65.31 82.55,62.64 82.55,44.7 J7.10
N$197
  Top 0.254: U6.8 80.74,70.37 79.47,69.1 79.47,65.15 82.14,62.48 82.14,46.84 J7.9
N$198
  Top 0.254: U6.11 80.96,68.87 80.69,68.6 80.69,65.65 83.36,62.98 83.36,40.44 J7.12
N$199
  Top 0.254: U6.12 81.4,65.52 83.77,63.15 83.77,38.3 J7.13
N$200
  Top 0.254: U6.13 82.09,65.41 84.18,63.32 84.18,36.17 J7.14
N$201
  Top 0.254: U6.14 82.59,65.48 84.58,63.48 84.58,34.04 J7.15
N$202
  Top 0.254: U6.16 83.59,65.63 85.39,63.82 85.39,29.77 J7.17
N$203
  Top 0.254: U6.17 84.09,65.7 85.8,63.99 85.8,27.64 J7.18
N$204
  Top 0.254: U6.15 83.09,65.56 84.99,63.65 84.99,31.9 J7.16
N$205
  Top 0.254: U6.10 80.89,69.37 80.28,68.77 80.28,65.48 82.96,62.81 82.96,42.57 J7.11
N$206
  Top 0.254: J7.22 87.43,19.1 87.43,64.66 86.09,66 U6.21
N$207
  Top 0.254: J7.23 87.83,16.97 87.83,64.83 86.59,66.08 U6.22
N$208
  Top 0.254: J7.20 86.61,23.37 86.61,64.33 85.09,65.86 U6.19
N$209
  Top 0.254: J7.19 86.21,25.5 86.21,64.16 84.59,65.78 U6.18
N$210
  Top 0.254: J7.21 87.02,21.23 87.02,64.5 85.59,65.93 U6.20
N$211
  Top 0.254: J7.24 88.24,14.83 88.24,65 87.09,66.15 U6.23
N$212
  Top 0.254: U6.24 87.67,67.6 87.67,66.14 88.65,65.17 88.65,12.7 J7.25
N$213  (via drill 0.35)
  Top 0.254: U6.25 89.21,68.37 89.21,67.85 90.91,66.14 90.93,66.14 v91.19,65.89
  Bottom 0.254: J14.2 v91.19,65.89
N$214  (via drill 0.35)
  Top 0.254: U6.26 89.42,68.87 89.71,68.58 89.71,68.26 90.91,67.05 90.93,67.05 v91.19,66.8
  Bottom 0.254: J14.3 89.97,59.64 89.97,65.83 90.93,66.8 v91.19,66.8
N$215  (via drill 0.35)
  Top 0.254: U6.28 89.91,69.87 90.91,68.87 90.96,68.87 v91.21,68.62
  Bottom 0.254: J14.5 89.51,55.02 89.51,66.97 91.15,68.62 v91.21,68.62
N$217  (via drill 0.35)
  Top 0.254: U6.29 90.32,70.37 90.91,69.78 90.93,69.78 v91.19,69.53
  Bottom 0.254: J14.6 89.1,52.89 89.1,67.44 v91.19,69.53
N$218  (via drill 0.35)
  Top 0.254: U6.30 90.73,70.87 90.91,70.69 90.93,70.69 v91.19,70.44
  Bottom 0.254: J14.7 88.69,50.75 88.69,67.97 91.15,70.44 v91.19,70.44
N$219  (via drill 0.35)
  Top 0.254: U6.31 90.24,71.37 90.42,71.55 90.98,71.55 v91.19,71.34
  Bottom 0.254: J14.8 88.29,48.62 88.29,68.48 91.15,71.34 v91.19,71.34
N$220  (via drill 0.35)
  Top 0.254: U6.32 90.04,71.87 90.62,72.46 90.98,72.46 v91.19,72.25
  Bottom 0.254: J14.9 87.88,46.48 87.88,68.98 91.15,72.25 v91.19,72.25
N$221  (via drill 0.35)
  Top 0.254: U6.33 89.83,72.37 90.83,73.37 91.13,73.37 v91.33,73.16
  Bottom 0.254: J14.10 87.47,44.35 87.47,69.48 91.15,73.16 v91.33,73.16
N$222  (via drill 0.35)
  Top 0.254: U6.34 89.62,72.87 90.21,73.46 90.21,73.66 90.97,74.42 v91.2,74.42
  Bottom 0.254: J14.11 86.72,42.57 86.72,69.98 91.15,74.42 v91.2,74.42
N$224  (via drill 0.35)
  Top 0.254: U6.37 87.59,75.49 87.88,75.49 89.58,77.2 89.58,77.22 v89.83,77.47
  Bottom 0.254: v89.83,77.47 89.83,75.97 85.46,71.6 85.46,36.2 J14.14
N$225  (via drill 0.35)
  Top 0.254: U6.38 87.09,75.7 87.38,75.99 87.59,75.99 88.93,77.33 v88.93,77.47
  Bottom 0.254: v88.93,77.47 88.93,75.77 85.05,71.89 85.05,34.08 J14.15
N$226  (via drill 0.35)
  Top 0.254: U6.39 86.59,75.91 87.17,76.49 87.38,76.49 88.02,77.13 v88.02,77.47
  Bottom 0.254: v88.02,77.47 88.02,75.57 84.6,72.15 84.6,31.98 J14.16
N$227  (via drill 0.35)
  Top 0.254: U6.40 86.09,76.11 86.96,76.99 87.11,76.99 v87.11,77.47
  Bottom 0.254: v87.11,77.47 87.11,75.36 84.18,72.43 84.18,29.87 J14.17
N$228  (via drill 0.35)
  Top 0.254: U6.48 82.09,75.49 81.74,75.49 80.03,77.2 80.03,77.22 v79.78,77.47
  Bottom 0.254: J14.25 80.74,12.99 80.74,72.94 79.84,73.84 79.84,77.42 v79.78,77.47
N$229  (via drill 0.35)
  Top 0.254: U6.47 82.59,75.7 82.29,75.99 82.09,75.99 80.75,77.33 80.75,77.42 v80.69,77.47
  Bottom 0.254: J14.24 81.15,15.12 81.15,15.24 81.15,73.85 80.75,74.25 80.75,77.42 v80.69,77.47
N$230  (via drill 0.35)
  Top 0.254: U6.46 83.09,75.91 82.5,76.49 82.29,76.49 81.65,77.13 81.65,77.42 v81.6,77.47
  Bottom 0.254: J14.23 81.65,17.15 81.65,77.42 v81.6,77.47
N$231  (via drill 0.35)
  Top 0.254: U6.45 83.59,76.11 82.56,77.14 82.56,77.42 v82.51,77.47
  Bottom 0.254: J14.22 82.06,19.28 82.06,73.85 82.51,74.3 v82.51,77.47
N$232  (via drill 0.35)
  Top 0.254: U6.44 84.09,76.32 83.47,76.94 83.47,77.42 v83.42,77.47
  Bottom 0.254: J14.21 82.47,21.42 82.47,21.59 82.47,73.55 83.42,74.5 v83.42,77.47
N$234  (via drill 0.35)
  Top 0.254: U6.42 85.09,76.53 85.29,76.73 v85.29,77.47
  Bottom 0.254: v85.29,77.47 85.29,74.96 83.34,73.01 83.34,25.62 J14.19
N$235  (via drill 0.35)
  Top 0.254: U6.41 85.59,76.32 86.2,76.94 v86.2,77.47
  Bottom 0.254: v86.2,77.47 86.2,75.16 83.75,72.72 83.75,27.75 J14.18
N$236  (via drill 0.35)
  Top 0.254: U6.36 89.21,73.87 89.21,74.3 90.91,76 90.93,76 v91.19,76.25
  Bottom 0.254: v91.19,76.25 90.93,76 90.91,76 85.88,70.97 85.88,38.32 J14.13

## Text on the board
tNames: 28 | 15 | DRV8328ARUYR | 1 | 14 | 56 | 29 | DRV8302DCA | 1 | 25 | 1 | 28 | DRV8323RSRGZT | 1 | 40 | 1 | 36 | 1 | 30 | TB67B000AHG | DRV8332DKD | MCF8316A1VRGFR | 18 | 19 | 20 | 21 | 24 | 48 | 15 | 16